# EAGLE board GboxRpmLim (EAGLE 7.5.0)
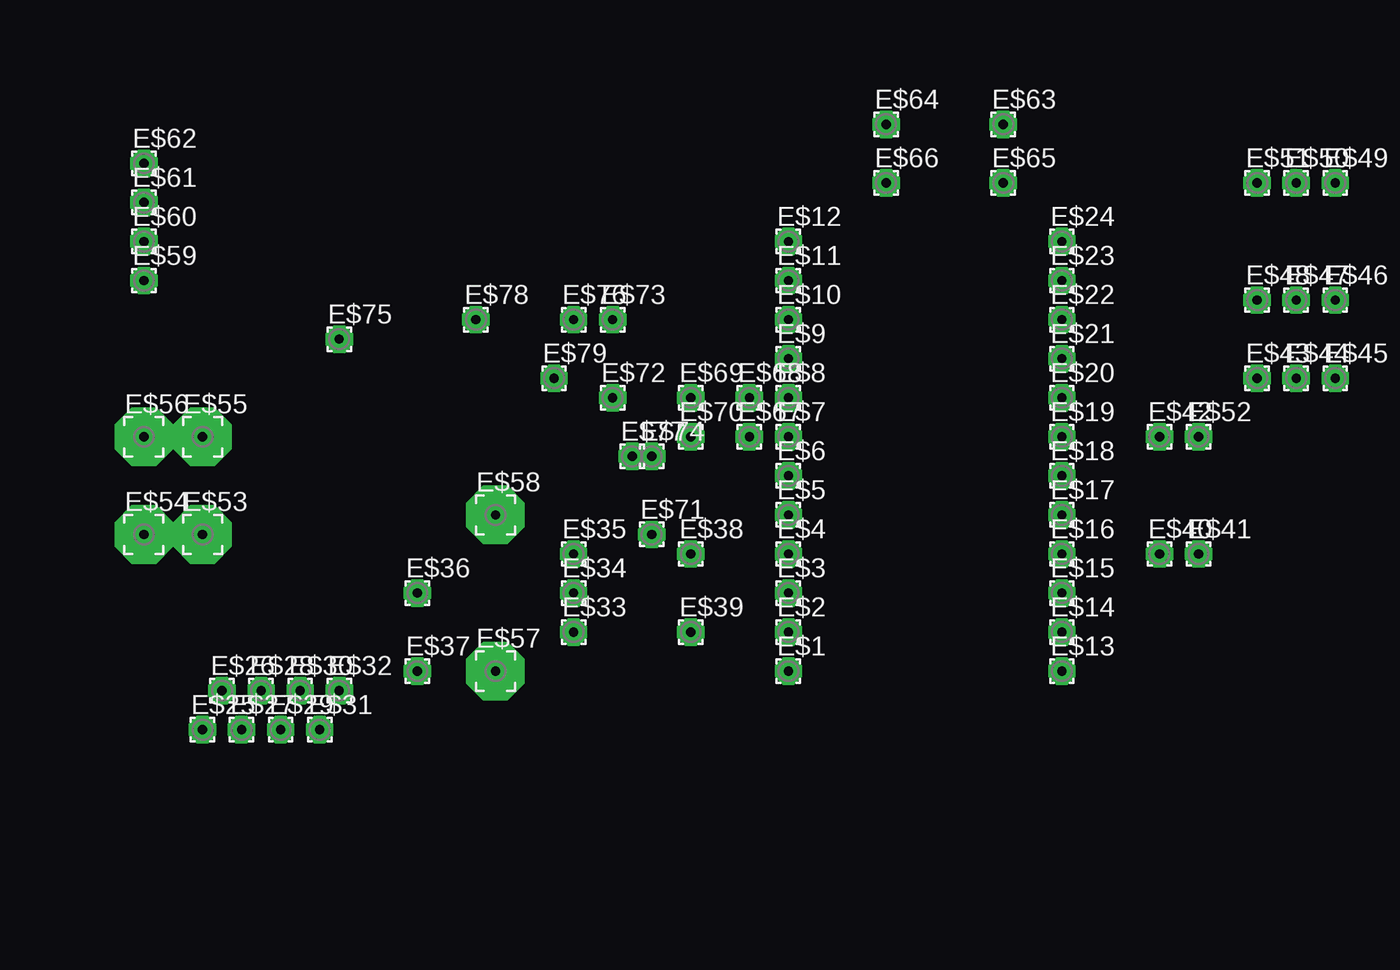
[diagram p0: board, top side]
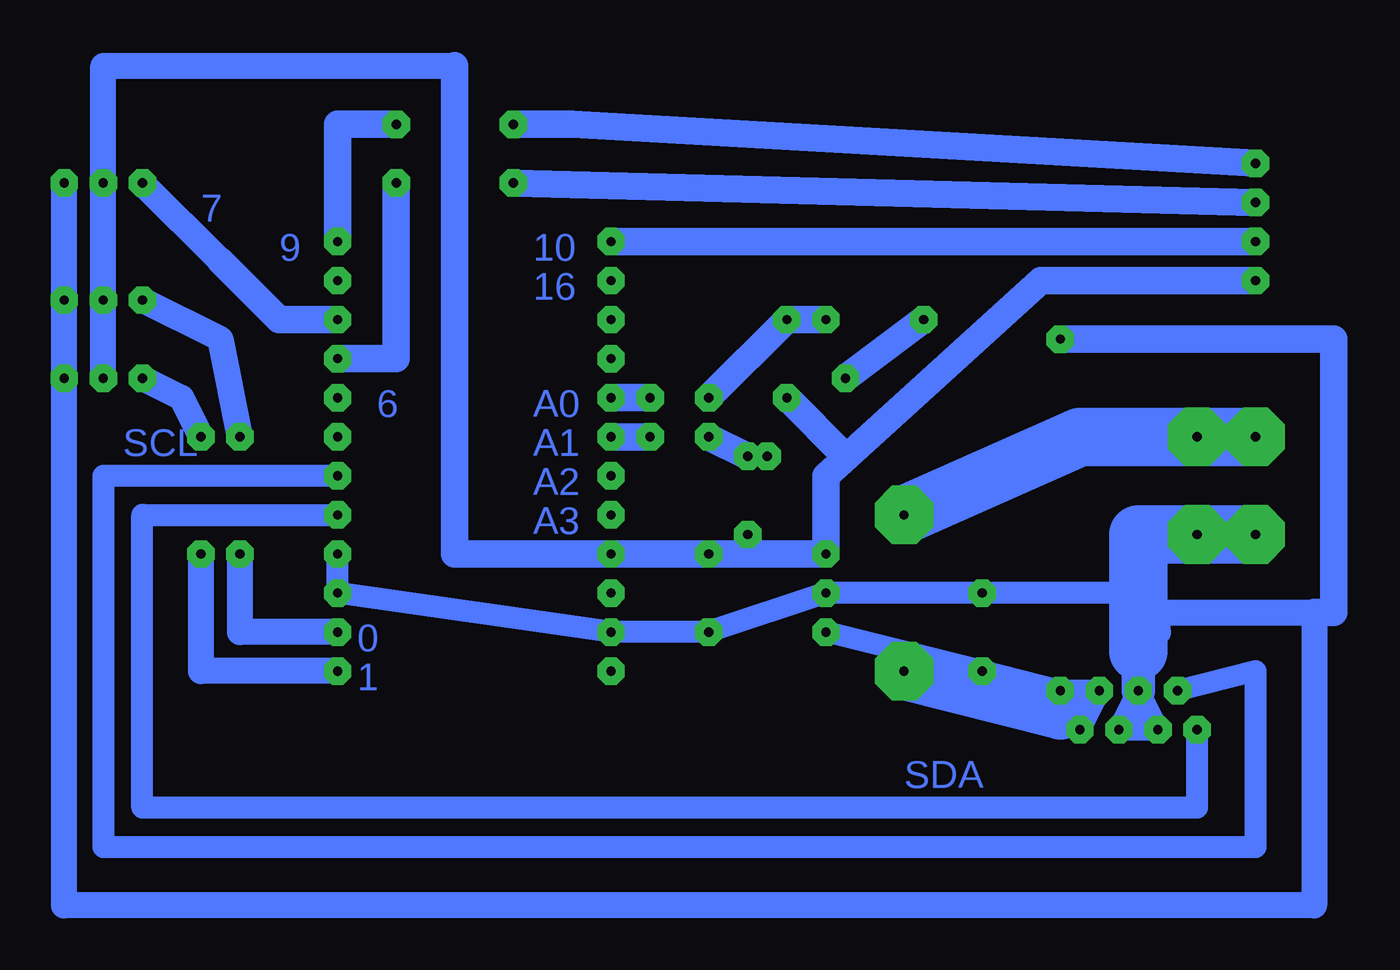
[diagram p1: board, bottom side, seen from below]

No outline drawn. Coordinates in mm, seen from the top.
Copper layers (1*16): Top 0.035mm / dielectric 1.5mm / Bottom 0.035mm
Design rules "default": minimum track width 10mil, minimum drill 24mil, track to track 8mil, track to pad 8mil, pad to pad 8mil, via to via 8mil, smd to smd 8mil, copper to edge 40mil, drill to drill 8mil, minimum pad ring 10mil, minimum via ring 8mil, stop-mask expansion 4mil, vias tented up to drill 0mil, thermal gap 10mil

## Footprints (pad centres in the part's own frame; a part is rotated, then mirrored left to right if it is on the bottom)
1,6/0,8 = drill 0.6 pad 1.778 octagon: 1 0,0
2,54/0,8 = drill 0.6 pad 3.81 octagon: 1 0,0

## Placement (x,y rotation side)
E$1  [1,6/0,8]  44.45,7.62 0 top
E$2  [1,6/0,8]  44.45,10.16 0 top
E$3  [1,6/0,8]  44.45,12.7 0 top
E$4  [1,6/0,8]  44.45,15.24 0 top
E$5  [1,6/0,8]  44.45,17.78 0 top
E$6  [1,6/0,8]  44.45,20.32 0 top
E$7  [1,6/0,8]  44.45,22.86 0 top
E$8  [1,6/0,8]  44.45,25.4 0 top
E$9  [1,6/0,8]  44.45,27.94 0 top
E$10  [1,6/0,8]  44.45,30.48 0 top
E$11  [1,6/0,8]  44.45,33.02 0 top
E$12  [1,6/0,8]  44.45,35.56 0 top
E$13  [1,6/0,8]  62.23,7.62 0 top
E$14  [1,6/0,8]  62.23,10.16 0 top
E$15  [1,6/0,8]  62.23,12.7 0 top
E$16  [1,6/0,8]  62.23,15.24 0 top
E$17  [1,6/0,8]  62.23,17.78 0 top
E$18  [1,6/0,8]  62.23,20.32 0 top
E$19  [1,6/0,8]  62.23,22.86 0 top
E$20  [1,6/0,8]  62.23,25.4 0 top
E$21  [1,6/0,8]  62.23,27.94 0 top
E$22  [1,6/0,8]  62.23,30.48 0 top
E$23  [1,6/0,8]  62.23,33.02 0 top
E$24  [1,6/0,8]  62.23,35.56 0 top
E$25  [1,6/0,8]  6.35,3.81 0 top
E$26  [1,6/0,8]  7.62,6.35 0 top
E$27  [1,6/0,8]  8.89,3.81 0 top
E$28  [1,6/0,8]  10.16,6.35 0 top
E$29  [1,6/0,8]  11.43,3.81 0 top
E$30  [1,6/0,8]  12.7,6.35 0 top
E$31  [1,6/0,8]  13.97,3.81 0 top
E$32  [1,6/0,8]  15.24,6.35 0 top
E$33  [1,6/0,8]  30.48,10.16 0 top
E$34  [1,6/0,8]  30.48,12.7 0 top
E$35  [1,6/0,8]  30.48,15.24 0 top
E$36  [1,6/0,8]  20.32,12.7 0 top
E$37  [1,6/0,8]  20.32,7.62 0 top
E$38  [1,6/0,8]  38.1,15.24 0 top
E$39  [1,6/0,8]  38.1,10.16 0 top
E$40  [1,6/0,8]  68.58,15.24 0 top
E$41  [1,6/0,8]  71.12,15.24 0 top
E$42  [1,6/0,8]  68.58,22.86 0 top
E$43  [1,6/0,8]  74.93,26.67 0 top
E$44  [1,6/0,8]  77.47,26.67 0 top
E$45  [1,6/0,8]  80.01,26.67 0 top
E$46  [1,6/0,8]  80.01,31.75 0 top
E$47  [1,6/0,8]  77.47,31.75 0 top
E$48  [1,6/0,8]  74.93,31.75 0 top
E$49  [1,6/0,8]  80.01,39.37 0 top
E$50  [1,6/0,8]  77.47,39.37 0 top
E$51  [1,6/0,8]  74.93,39.37 0 top
E$52  [1,6/0,8]  71.12,22.86 0 top
E$53  [2,54/0,8]  6.35,16.51 0 top
E$54  [2,54/0,8]  2.54,16.51 0 top
E$55  [2,54/0,8]  6.35,22.86 0 top
E$56  [2,54/0,8]  2.54,22.86 0 top
E$57  [2,54/0,8]  25.4,7.62 0 top
E$58  [2,54/0,8]  25.4,17.78 0 top
E$59  [1,6/0,8]  2.54,33.02 0 top
E$60  [1,6/0,8]  2.54,35.56 0 top
E$61  [1,6/0,8]  2.54,38.1 0 top
E$62  [1,6/0,8]  2.54,40.64 0 top
E$63  [1,6/0,8]  58.42,43.18 0 top
E$64  [1,6/0,8]  50.8,43.18 0 top
E$65  [1,6/0,8]  58.42,39.37 0 top
E$66  [1,6/0,8]  50.8,39.37 0 top
E$67  [1,6/0,8]  41.91,22.86 0 top
E$68  [1,6/0,8]  41.91,25.4 0 top
E$69  [1,6/0,8]  38.1,25.4 0 top
E$70  [1,6/0,8]  38.1,22.86 0 top
E$71  [1,6/0,8]  35.56,16.51 0 top
E$72  [1,6/0,8]  33.02,25.4 0 top
E$73  [1,6/0,8]  33.02,30.48 0 top
E$74  [1,6/0,8]  35.56,21.59 0 top
E$75  [1,6/0,8]  15.24,29.21 0 top
E$76  [1,6/0,8]  30.48,30.48 0 top
E$77  [1,6/0,8]  34.29,21.59 0 top
E$78  [1,6/0,8]  24.13,30.48 0 top
E$79  [1,6/0,8]  29.21,26.67 0 top

## Library data of the parts
E$1-E$79 = cls

## Nets
S$1: E$61.1 E$66.1
S$2: E$30.1 E$31.1 E$32.1 E$33.1 E$37.1
S$3: E$17.1 E$25.1
S$4: E$18.1 E$26.1
S$5: E$35.1 E$38.1 E$44.1 E$47.1 E$50.1 E$59.1
S$6: E$45.1 E$46.1 E$49.1
S$7: E$8.1 E$68.1
S$8: E$14.1 E$40.1
S$9: E$13.1 E$41.1
S$10: E$42.1 E$48.1
S$11: E$43.1 E$52.1
S$12: E$2.1 E$15.1 E$16.1 E$27.1 E$28.1 E$29.1 E$34.1 E$36.1 E$39.1 E$54.1
S$13: E$57.1
S$14: E$56.1 E$58.1
S$15: E$4.1
S$16: E$24.1
S$17: E$62.1 E$64.1
S$18: E$22.1 E$51.1
S$19: E$21.1
S$20: E$12.1 E$60.1
S$21: E$7.1 E$67.1
S$22: E$70.1 E$74.1
S$23: E$69.1 E$73.1 E$76.1
S$24: E$72.1
S$25: E$78.1 E$79.1

## Tracks (layer width: path | path; a pad name or v marks a point on that pad's centre or on a via)
S$1
  Bottom 1.778: E$66.1 E$61.1
S$2
  Bottom 1.422: 13.97,6.35 E$30.1 E$31.1 | 13.97,6.35 E$32.1 | E$32.1 E$31.1 | 13.97,6.35 E$31.1 | E$32.1 E$37.1 E$33.1
S$3
  Bottom 1.422: E$25.1 6.35,-1.27 74.93,-1.27 74.93,17.78 E$17.1
S$4
  Bottom 1.422: E$18.1 77.47,20.32 77.47,-3.81 2.54,-3.81 2.54,7.62 E$26.1
S$5
  Bottom 1.422: E$35.1 E$38.1
  Bottom 1.676: E$44.1 E$47.1 E$50.1 77.47,46.99 54.61,46.99
  Bottom 1.778: 54.61,46.99 54.61,15.24 E$35.1 30.48,20.32 16.51,33.02 E$59.1
S$6
  Bottom 1.676: 8.89,10.16 8.89,11.43 -1.27,11.43 -1.27,-7.62 80.01,-7.62 E$45.1 E$46.1 E$49.1
  Bottom 1.778: -1.27,11.43 -2.54,11.43 -2.54,29.21 15.24,29.21
S$7
  Bottom 1.778: E$8.1 E$68.1
S$8
  Bottom 1.676: E$14.1 68.58,10.16 E$40.1
S$9
  Bottom 1.676: E$13.1 71.12,7.62 E$41.1
S$10
  Bottom 1.676: E$42.1 69.85,29.21 E$48.1
S$11
  Bottom 1.676: E$43.1 72.39,25.4 E$52.1
S$12
  Bottom 1.422: E$28.1 E$27.1 10.16,3.81 | 10.16,3.81 E$29.1 E$28.1 | E$28.1 10.16,3.81 | 10.16,11.43 10.16,12.7 E$36.1 E$34.1 E$39.1 E$2.1 E$15.1 E$16.1
  Bottom 2.184: E$28.1 10.16,8.89 10.16,10.16
  Bottom 3.81: E$54.1 10.16,16.51 10.16,8.89 | 10.16,10.16 10.16,11.43
S$13
  Bottom 3.81: 15.24,5.08 E$57.1
S$14
  Bottom 3.81: E$58.1 13.97,22.86 E$56.1
S$15
  Bottom 1.422: E$4.1 35.56,15.24
S$16
  Bottom 1.778: E$24.1 62.23,43.18 58.42,43.18
S$17
  Bottom 1.778: E$64.1 46.99,43.18 E$62.1
S$18
  Bottom 1.676: 69.85,34.29 E$51.1
  Bottom 1.778: E$22.1 66.04,30.48 69.85,34.29
S$19
  Bottom 1.778: E$21.1 58.42,27.94 58.42,39.37
S$20
  Bottom 1.778: E$12.1 36.83,35.56 35.56,35.56 E$60.1
S$21
  Bottom 1.778: E$7.1 E$67.1
S$22
  Bottom 1.778: E$74.1 E$70.1
S$23
  Bottom 1.778: E$69.1 E$73.1 E$76.1
S$24
  Bottom 1.778: E$72.1 29.21,21.59
S$25
  Bottom 1.778: E$78.1 E$79.1

## Text on the board
Bottom: 7 | 10 | 9 | 16 | A0 | 6 | A1 | SCL | A2 | A3 | 0 | 1 | SDA